# Altium PCB PCB NRES Front Plane board.PcbDoc
Units mm, origin at the board's own origin, x right, y up, seen from the top; angles counter-clockwise.
Board outline 213.05 x 128.4 mm, 2 copper layers (Top Layer (GTL), Bottom Layer (GBL)); 3 components, 0 nets, 65 pads, 0 vias.
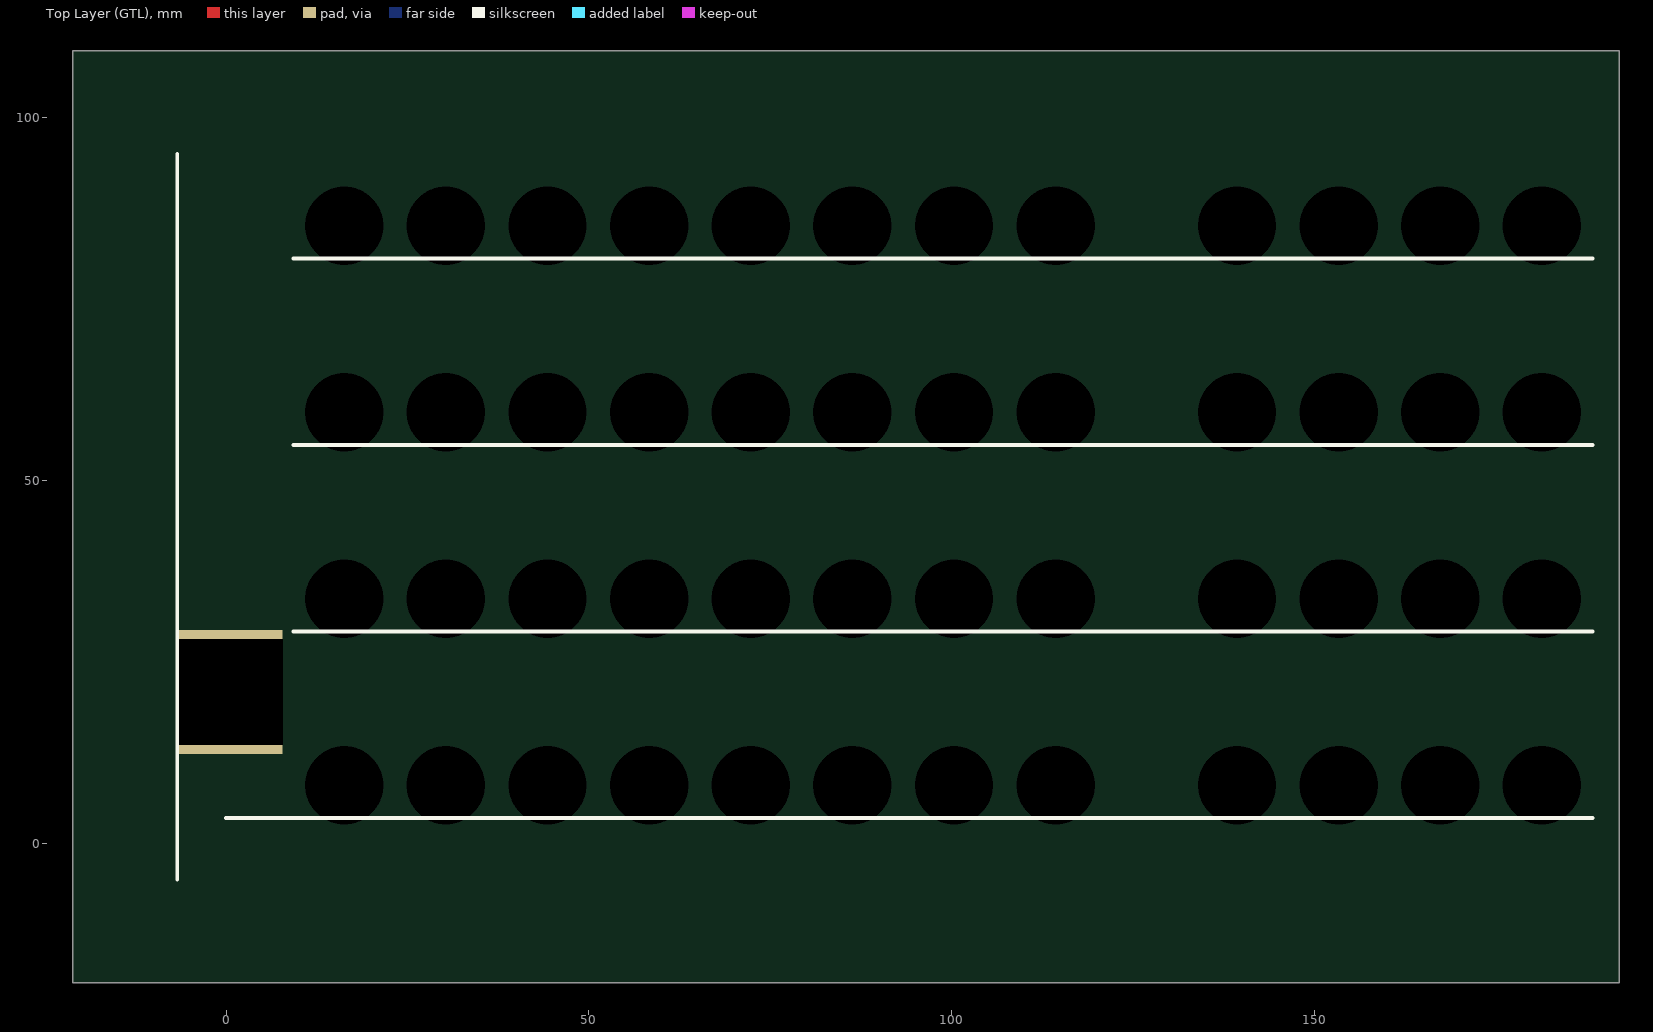
[diagram p0: Top Layer (GTL) view]
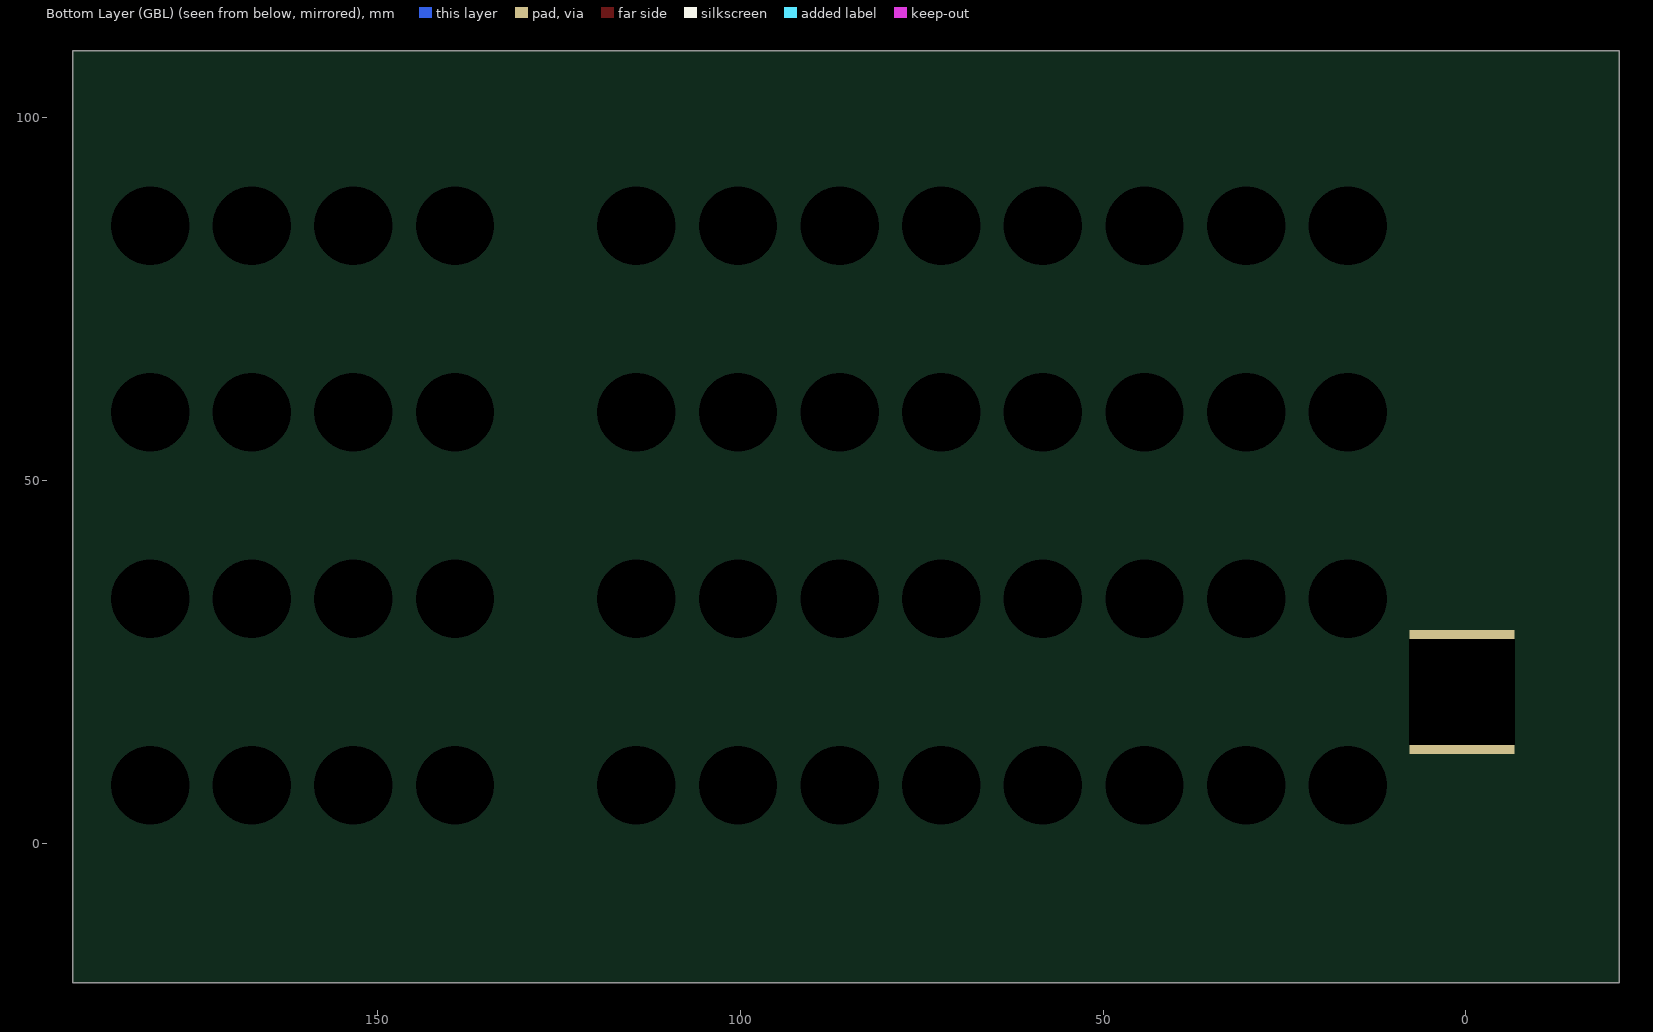
[diagram p1: Bottom Layer (GBL) view, seen from below]

## Layer stack, top to bottom
Top Layer (GTL): signal copper 0.0356
Dielectric: core 0.32, FR-4, Dk 4.8
Bottom Layer (GBL): signal copper 0.0356

## Board outline
-21.1,-19.2 191.95,-19.2 191.95,109.2 -21.1,109.2

## Design rules (kind name [scope] priority, off if disabled: settings)
Clearance [All] p1: gap=0.254
PolygonConnect [All] p1: connectstyle=Relief reliefconductorwidth=0.254 reliefentries=4 polygonreliefangle="90 Angle"
RoutingVias [All] p1: holewidth=0.711 width=1.27 viastyle="Through Hole" minholewidth=0.711 minwidth=1.27 maxholewidth=0.711 maxwidth=1.27
SilkscreenOverComponentPads [All] p1: minsilkscreentomaskgap=0.254
SolderMaskExpansion [All] p1: expansion=0.102
Width [All] p1: maxlimit=0.254 minlimit=0.254 preferedwidth=0.254
27 further rules are at their usual default settings.

## Components (designator, comment, footprint, x,y, rotation, side; value= is the part's Value field where it differs from the comment)
? "Comment" "TARGET MECHANICAL 5" 213.85,-116.482 r0 top
? "Comment" "TARGET MECHANICAL 5" 212.834,-96.67 r0 top
? "Comment" "TARGET MECHANICAL 5" 211.818,-79.906 r0 top

## Footprints (in the part's own frame and the unit in brackets; to place one, negate y for a bottom-side part, rotate by r counter-clockwise, add the part's x,y. Pads: shape width x height; smd on the part's side, far side on the other; paste and mask are expansions set on the pad)
"TARGET MECHANICAL 5" [mm]

## Free pads (board coordinates)
  round 9.1 hole 10.8 unplated paste-0.152 mask-0.089: 9(16.3,8) 9(16.3,8) 9(16.3,8) 9(16.3,8) 9(16.3,33.7) 9(16.3,33.7) 9(16.3,59.4) 9(16.3,59.4) 9(16.3,85.1) 9(16.3,85.1) 10(30.3,8) 10(30.3,8) 10(30.3,33.7) 10(30.3,59.4) 10(30.3,85.1) 11(44.3,8) 11(44.3,8) 11(44.3,33.7) 11(44.3,59.4) 11(44.3,85.1) 12(58.3,8) 12(58.3,8) 12(58.3,33.7) 12(58.3,59.4) 12(58.3,85.1) 13(72.3,8) 13(72.3,8) 13(72.3,33.7) 13(72.3,59.4) 13(72.3,85.1) 14(86.3,8) 14(86.3,8) 14(86.3,33.7) 14(86.3,59.4) 14(86.3,85.1) 15(100.3,8) 15(100.3,8) 15(100.3,33.7) 15(100.3,59.4) 15(100.3,85.1) 16(114.3,8) 16(114.3,8) 16(114.3,33.7) 16(114.3,59.4) 16(114.3,85.1) 17(139.3,8) 17(139.3,8) 17(139.3,33.7) 17(139.3,59.4) 17(139.3,85.1) 18(153.3,8) 18(153.3,8) 18(153.3,33.7) 18(153.3,59.4) 18(153.3,85.1) 19(167.3,8) 19(167.3,8) 19(167.3,33.7) 19(167.3,59.4) 19(167.3,85.1) 20(181.3,8) 20(181.3,33.7) 20(181.3,59.4) 20(181.3,85.1)
  rect 14.5x17.11 hole 14.5 square unplated paste-0.152 mask-0.089: 10(0.55,20.85)

## Nets (pads, with @x,y where several pads share a name; then routed paths per layer and width w, separated by ;. In a path a pad name is that pad's centre, name@x,y a point inside that pad or via, vN(x,y) a via of type N, cw(c..) or ccw(c..) an arc to the next point about the centre after c; other vN are vias at no path point)

## Other copper
Top Layer (GTL):
  text "*.GTL - TOP LAYER GERBER DATA" at 115.933,-83.081 h2.03
Bottom Layer (GBL):
  text "*.GBL - BOTTOM LAYER GERBER DATA" at 115.933,-118.209 h2.03

## Silkscreen, mask and mechanical layers (free items; w line width, h text height)
Top Overlay:
  lines w0.5: -6.7,-5 -6.7,95 ; 0,3.5 188.3,3.5 ; 9.3,29.2 188.3,29.2 ; 9.3,54.9 188.3,54.9 ; 9.3,80.6 188.3,80.6
  text "Threads on LEMO sitting on PCB top surface" at 224.053,5.105 h1.52
  text "PCB is 3mm back from backside of front panel" at 225.018,-9.313 h1.02
  text "the 3mm leaves room for back nut and washer" at 225.018,-12.713 h1.02
  text "LEMOs are installed flush to PCB then back nut is screwed on" at 224.018,-16.213 h1.02
  text "LEMO sticks out of front panel 4mm to fit nut + colored washer" at 223.018,-19.213 h1.02
  text "*.GTO - TOP OVERLAY GERBER DATA" at 115.933,-122.112 h2.03
Bottom Overlay:
  text "*GBO - BOTTOM OVERLAY GERBER DATA" at 115.933,-133.822 h2.03
Top Paste:
  text "*.GTP - TOP-SIDE SOLDER PASTE MASK" at 115.933,-129.919 h2.03
Bottom Paste:
  text "*.GBP - BOTTOM-SIDE SOLDER PASTE MASK" at 115.933,-141.628 h2.03
Top Solder:
  text "*.GTS - TOP SOLDER MASK GERBER DATA" at 115.933,-126.015 h2.03
Bottom Solder:
  text "*.GBS - BOTTOM SOLDER MASK GERBER DATA" at 115.933,-137.725 h2.03
Mechanical 2:
  lines w0.254: -233.292,-237.513 -233.292,168.887 300.108,168.887 300.108,-237.513 -233.292,-237.513 ; 197.111,-234.821 ccw(c198.381,-234.821) 198.381,-236.091 206.763,-236.091 ccw(c206.763,-235.075) 207.779,-235.075 207.779,-230.757 ccw(c206.763,-230.757) 206.763,-229.741 197.111,-229.741 197.111,-234.821 ; 197.111,-227.455 ccw(c198.381,-227.455) 198.381,-228.725 297.441,-228.725 ccw(c297.441,-227.455) 298.711,-227.455 298.711,-222.629 ccw(c297.441,-222.629) 297.441,-221.359 197.111,-221.359 197.111,-227.455 ; 197.111,-219.073 ccw(c198.381,-219.073) 198.381,-220.343 246.133,-220.343 ccw(c246.133,-219.073) 247.403,-219.073 247.403,-215.263 ccw(c246.133,-215.263) 246.133,-213.993 197.111,-213.993 197.111,-219.073 ; 197.111,-211.961 ccw(c198.127,-211.961) 198.127,-212.977 218.701,-212.977 ccw(c218.701,-211.707) 219.971,-211.707 219.971,-207.897 ccw(c218.701,-207.897) 218.701,-206.627 197.111,-206.627 197.111,-211.961 ; 208.795,-235.075 ccw(c209.811,-235.075) 209.811,-236.091 259.595,-236.091 ccw(c259.595,-235.075) 260.611,-235.075 260.611,-230.757 ccw(c259.595,-230.757) 259.595,-229.741 208.795,-229.741 208.795,-235.075 ; 220.987,-211.707 ccw(c222.257,-211.707) 222.257,-212.977 246.133,-212.977 ccw(c246.133,-211.707) 247.403,-211.707 247.403,-207.897 ccw(c246.133,-207.897) 246.133,-206.627 220.987,-206.627 220.987,-211.707 ; 248.419,-219.073 ccw(c249.689,-219.073) 249.689,-220.343 297.441,-220.343 ccw(c297.441,-219.073) 298.711,-219.073 298.711,-215.263 ccw(c297.441,-215.263) 297.441,-213.993 248.419,-213.993 248.419,-219.073 ; 248.419,-211.707 ccw(c249.689,-211.707) 249.689,-212.977 273.565,-212.977 ccw(c273.565,-211.707) 274.835,-211.707 274.835,-207.897 ccw(c273.565,-207.897) 273.565,-206.627 248.419,-206.627 248.419,-211.707 ; 261.627,-234.821 ccw(c262.897,-234.821) 262.897,-236.091 271.279,-236.091 ccw(c271.279,-235.075) 272.295,-235.075 272.295,-230.757 ccw(c271.279,-230.757) 271.279,-229.741 261.627,-229.741 261.627,-234.821 ; 273.311,-235.075 ccw(c274.327,-235.075) 274.327,-236.091 297.441,-236.091 ccw(c297.441,-234.821) 298.711,-234.821 298.711,-231.011 ccw(c297.441,-231.011) 297.441,-229.741 273.311,-229.741 273.311,-235.075 ; 275.851,-211.707 ccw(c277.121,-211.707) 277.121,-212.977 297.441,-212.977 ccw(c297.441,-211.707) 298.711,-211.707 298.711,-207.897 ccw(c297.441,-207.897) 297.441,-206.627 275.851,-206.627 275.851,-211.707
  lines w0.508: -232.782,-221.108 cw(c-231.514,-223.01) -231.514,-220.724 ; -231.514,-221.74 ccw(c-231.514,-223.01) -232.784,-223.01 -232.784,-235.456 ccw(c-231.514,-235.456) -231.514,-236.726 -150.234,-236.726 ccw(c-150.234,-235.456) -148.964,-235.456 -148.964,-226.82 ccw(c-150.234,-226.82) -150.234,-225.55 -217.29,-225.55 ; -148.332,-236.724 ccw(c-150.234,-235.456) -147.948,-235.456 -147.948,-226.82 ; 195.998,-237.106 cw(c198.381,-234.821) 195.079,-234.821 195.079,-192.403 cw(c198.381,-192.403) 198.381,-189.101 297.441,-189.101 cw(c297.441,-192.403) 299.693,-189.988 ; -42.03,-232.941 ccw(c-38.728,-232.941) -38.728,-236.243 81.668,-236.243 ccw(c81.668,-232.941) 84.97,-232.941 84.97,-192.555 ccw(c81.668,-192.555) 81.668,-189.253 -38.728,-189.253 ccw(c-38.728,-192.555) -42.03,-192.555 -42.03,-232.941 ; 196.095,-234.821 ccw(c198.381,-234.821) 198.381,-237.107 297.441,-237.107 ccw(c297.441,-234.821) 299.727,-234.821 299.727,-192.403 ccw(c297.441,-192.403) 297.441,-190.117 198.381,-190.117 ccw(c198.381,-192.403) 196.095,-192.403 196.095,-234.821
  lines w0.61: 22.74,-232.179 26.55,-232.179 ; 22.74,-225.829 26.55,-225.829 ; 22.74,-219.479 26.55,-219.479 ; 22.74,-213.129 26.55,-213.129 ; 22.74,-206.779 26.55,-206.779
  lines w0.762: -245.992,-250.213 -245.992,181.587 312.808,181.587 312.808,-250.213 -245.992,-250.213
  lines w1.27: 200.794,-202.842 242.704,-202.842 ; 200.794,-193.19 242.704,-193.19 ; 242.704,-202.842 242.704,-193.19 ; 242.704,-202.842 200.54,-202.842 200.54,-193.19 242.704,-193.19
  text "NOTES (UNLESS OTHERWISE SPECIFIED):" at -225.164,155.577 h2.29
  text "GENERAL" at -222.624,150.497 h2.29
  text "1)" at -220.084,145.416 h1.91
  text "PCB IS x-LAYER, .062\" THICK." at -215.004,145.417 h1.91
  text "2)" at -220.084,141.606 h1.91
  text "CONSTRUCTION IS SOLDER-MASK-OVER-BARE-COPPER (SMOBC)." at -215.004,141.606 h1.91
  text "3)" at -220.084,137.796 h1.91
  text "ACCEPTABILITY SHALL BE BASED ON IPC-A-600, CLASS 2." at -215.004,137.796 h1.91
  text "4)" at -220.084,133.986 h1.91
  text "THE FOLLOWING GERBER RS274X PHOTO TOOL FILES SHALL BE USED TO DEFINE ALL CIRCUIT FEATURES:" at -215.004,133.986 h1.91
  text "*.GTL - TOP LAYER GERBER DATA" at -208.044,128.628 h2.03
  text "*.G1 - MID LAYER 1 GERBER DATA" at -208.044,124.725 h2.03
  text "*.G2 - MID LAYER 2 GERBER DATA" at -208.044,120.822 h2.03
  text "*.G3 - MID LAYER 3 GERBER DATA" at -208.044,116.919 h2.03
  text "*.GP1 - INTERNAL PLANE LAYER 1 GERBER DATA" at -208.044,113.016 h2.03
  text "*.GP2 - INTERNAL PLANE LAYER 2 GERBER DATA" at -208.044,109.112 h2.03
  text "*.GP3- INTERNAL PLANE LAYER 3 GERBER DATA" at -208.044,105.209 h2.03
  text "*.GP4 - INTERNAL PLANE LAYER 4 GERBER DATA" at -208.044,101.306 h2.03
  text "*.GP5- INTERNAL PLANE LAYER 5 GERBER DATA" at -208.044,97.403 h2.03
  text "*.GBL - BOTTOM LAYER GERBER DATA" at -208.044,93.5 h2.03
  text "*.GTO - TOP OVERLAY GERBER DATA" at -208.044,89.597 h2.03
  text "*.GTS - TOP SOLDER MASK GERBER DATA" at -208.044,85.694 h2.03
  text "*.GTP - TOP-SIDE SOLDER PASTE MASK" at -208.044,81.79 h2.03
  text "*GBO - BOTTOM OVERLAY GERBER DATA" at -208.044,77.887 h2.03
  text "*.GBS - BOTTOM SOLDER MASK GERBER DATA" at -208.044,73.984 h2.03
  text "*.GBP - BOTTOM-SIDE SOLDER PASTE MASK" at -208.044,70.081 h2.03
  text "5)" at -222.547,51.901 h1.91
  text "THE PHOTO TOOL SHALL NOT BE COMPENSATED WITHOUT PRIOR ENGINEERING APPROVAL." at -217.467,51.901 h1.91
  text "PCB DESIGNER: RICH LOBDILL   PH (805) 880-1621  FAX (805) 961-1792." at -217.467,48.092 h1.91
  text "FABRICATION TOLERANCES" at -221.15,39.804 h2.29
  text "6)" at -218.61,34.723 h1.91
  text "END PRODUCT CONDUCTOR WIDTHS AND PAD DIAMETERS SHALL NOT VARY MORE THAN" at -213.53,34.723 h1.91
  text "0.002\" FROM THE 1:1 DIMENSIONS OF THE MASTER ARTWORK." at -213.53,30.914 h1.91
  text "7)" at -218.61,27.103 h1.91
  text "THE CONDUCTIVE PATTERN SHALL BE POSITIONED SO THAT THE LOCATION OF ANY PAD OR" at -213.53,27.103 h1.91
  text "LAND SHALL BE WITHIN 0.005\" DIAMETER TO THE TRUE POSITION OF THE HOLE IT CIRCUMSCRIBES." at -213.53,23.294 h1.91
  text "8)" at -218.61,19.483 h1.91
  text "ALL DRILL HOLE SIZES AND TOLERANCES APPLY AFTER PLATING." at -213.53,19.483 h1.91
  text "9)" at -218.61,15.673 h1.91
  text "THE MINIMUM ANNULAR RING SHALL BE 0.005\"." at -213.53,15.673 h1.91
  text "10)" at -220.007,11.863 h1.91
  text "BOW AND TWIST SHALL NOT EXCEED 0.010\" PER INCH." at -213.53,11.863 h1.91
  text "11)" at -219.753,8.053 h1.91
  text "FOR PCB ROUTING DIMENSIONS: .XXX = +/-.005\"  .XX = +/-.020\"" at -213.53,8.053 h1.91
  text "MATERIAL" at -221.15,2.974 h2.29
  text "12)" at -220.007,-2.107 h1.91
  text "BASE MATERIAL IS FR4 EPOXY FIBERGLASS" at -213.353,-2.258 h1.91
  text "SEE STACK-UP LEGEND FOR COPPER CLADDING CALL OUTS" at -213.353,-5.814 h1.91
  text "13)" at -220.007,-5.917 h1.91
  text "PLATING" at -221.15,-10.996 h2.29
  text "14)" at -220.007,-15.95 h1.91
  text "ALL HOLES AND CONDUCTIVE SURFACES SHALL BE PLATED WITH A MINIMUM OF 0.001\" COPPER." at -213.53,-15.95 h1.91
  text "15)" at -220.007,-19.76 h1.91
  text "AFTER SOLDERMASK, ALL EXPOSED HOLES AND CONDUCTIVE SURFACES SHALL BE COATED" at -213.53,-19.76 h1.91
  text "WITH A GOLD IMMERSION PLATING TO PRESERVE SOLDERABILITY." at -213.353,-23.594 h1.91
  text "16)" at -219.347,-28.217 h1.91
  text "COPPER THEVING ON LAYERS AS NEEDED" at -213.276,-28.269 h1.91
  text "COATINGS" at -221.15,-36.142 h2.29
  text "THE SOLDERMASK SHALL BE BLACK LIQUID PHOTO-IMAGEABLE PER IPC-SM-840, TYPE-B, CLASS 2." at -213.53,-41.096 h1.91
  text "17)" at -219.728,-41.171 h1.91
  text "THE SOLDERMASK REGISTRATION ALLOWANCE IS 0.003\".  THERE SHALL BE NO SOLDERMASK ON" at -213.53,-44.906 h1.91
  text "18)" at -219.982,-45.616 h1.91
  text "ANY SOLDER PAD OR LAND." at -213.53,-48.716 h1.91
  text "MARKING" at -221.15,-53.795 h2.29
  text "THE LEGEND SHALL BE SCREEN-PRINTED USING PERMANENT YELLOW EPOXY INK." at -213.53,-58.749 h1.91
  text "19)" at -220.109,-58.824 h1.91
  text "THE SCREEN PRINTING REGISTRATION ALLOWANCE IS 0.007\".  THERE SHALL BE NO INK ON ANY" at -213.53,-62.559 h1.91
  text "20)" at -220.109,-63.015 h1.91
  text "SOLDER PAD OR LAND." at -213.53,-66.368 h1.91
  text "21)" at -220.007,-69.798 h1.91
  text "THE VENDOR CODE AND UL FLAMMABILITY RATING MAY BE ETCHED IN THE FOIL OR MARKED IN" at -213.53,-70.179 h1.91
  text "PERMANENT EPOXY INK (VENDOR'S OPTION)." at -213.53,-73.988 h1.91
  text "ELECTRICAL TESTING" at -221.15,-79.068 h2.29
  text "22)" at -220.007,-84.022 h1.91
  text "ALL BOARDS SHALL BE ELECTRICALLY TESTED TO THE SUPPLIED IPC-D-356A NET LIST" at -213.53,-84.022 h1.91
  text "*.G1 - MID LAYER 1 GERBER DATA" at 115.933,-86.984 h2.03
  text "FOR CONTINUITY, OPENS AND SHORTS." at -213.53,-87.831 h1.91
  text "*.G2 - MID LAYER 2 GERBER DATA" at 115.933,-90.887 h2.03
  text "*.G3 - MID LAYER 3 GERBER DATA" at 115.933,-94.79 h2.03
  text "*.GP1 - INTERNAL PLANE LAYER 1 GERBER DATA" at 115.933,-98.693 h2.03
  text "*.GP2 - INTERNAL PLANE LAYER 2 GERBER DATA" at 115.933,-102.597 h2.03
  text "*.GP3- INTERNAL PLANE LAYER 3 GERBER DATA" at 115.933,-106.5 h2.03
  text "COPPER THICKNESS" at 7.459,-110.22 h2.54
  text "*.GP4 - INTERNAL PLANE LAYER 4 GERBER DATA" at 115.933,-110.403 h2.03
  text "*.GP5- INTERNAL PLANE LAYER 5 GERBER DATA" at 115.933,-114.306 h2.03
  text "1/2 oz,  1 oz Finished" at -14.841,-117.72 h2.54
  text "1 oz" at -14.241,-127.02 h2.54
  text "1 oz" at -14.241,-134.72 h2.54
  text "2 oz" at -13.141,-144.62 h2.54
  text "2 oz" at -12.941,-153.12 h2.54
  text "1 oz" at -13.941,-161.82 h2.54
  text "1 oz" at -13.941,-171.42 h2.54
  text "1/2 oz,  1 oz Finished" at -17.841,-180.62 h2.54
  text "Las Cumbres Observatory, Inc." at 247.022,-193.698 h2.29
  text "Las Cumbres Observatory" at 202.064,-196.746 h3.81
  text "PRIMARY PCB SPECIFICATIONS" at -30.676,-197.127 h5.08
  text "6740 Cortona Dr." at 258.198,-197.61 h2.29
  text "Global Telescope Network" at 206.128,-200.81 h3.17
  text "Goleta, CA 93117" at 256.928,-201.42 h2.29
  text "(REFER TO COMPLETE SPEC LISTING AT LEFT FOR FURTHER DETAILS)" at -39.49,-202.334 h2.54
  text "www.lcogt.net" at 260.484,-205.128 h2.29
  text "DATE" at 197.619,-207.942 h0.81
  text "DESIGNED" at 221.495,-207.942 h0.81
  text "DRAWN" at 248.927,-207.942 h0.81
  text "SCALE" at 276.359,-207.942 h0.81
  text "NUMBER OF LAYERS" at -36.95,-208.684 h3.81
  text "XX" at 53.22,-208.684 h3.81
  text "Rich Lobdill" at 256.674,-210.462 h1.4
  text "Rich Lobdill" at 228.099,-210.589 h1.4
  text "1 : 1" at 283.598,-210.945 h2.29
  text "XX/XX/XXXX" at 198.381,-211.122 h2.29
  text "FINISHED THICKNESS" at -36.95,-215.034 h3.81
  text ".062\"" at 48.775,-215.034 h3.81
  text "CHECKED/DATE" at 197.619,-215.308 h0.81
  text "APPROVED/DATE" at 248.927,-215.308 h0.81
  text "BASE MATERIAL" at -36.95,-221.384 h3.81
  text "FR4" at 46.87,-221.384 h3.81
  text "TITLE" at 197.619,-222.674 h0.81
  text "175-XXXXX, NAME" at 203.207,-226.337 h2.54
  text "GOLD IMMERSION" at 34.323,-226.896 h3.81
  text "PLATING TYPE" at -36.95,-227.734 h3.81
  text "THIS DRAWING EMBODIES A PROPRIETARY DESIGN OWNED BY LAS CUMBRES" at -230.498,-228.344 h1.52
  text "OBSERVATORY.  IT IS SUBMITTED FOR A SPECIFIC PURPOSE UNDER A CON-" at -230.498,-230.884 h1.52
  text "SIZE" at 197.619,-231.056 h0.81
  text "DOC NO." at 209.303,-231.056 h0.81
  text "REV" at 262.135,-231.056 h0.81
  text "SHEET" at 273.819,-231.056 h0.81
  text "FIDENTIAL RELATIONSHIP, AND EXCEPT FOR PURPOSES EXPRESSLY GRANTED" at -230.498,-233.297 h1.52
  text "OF" at 284.741,-233.678 h1.52
  text "SOLDER MASK COLOR" at -36.95,-234.084 h3.81
  text "BLACK" at 50.045,-234.084 h3.81
  text "1" at 280.423,-234.186 h2.54
  text "X" at 290.583,-234.186 h2.54
  text "1" at 265.818,-234.516 h3.3
  text "-" at 223.4,-234.567 h3.3
  text "GPT" at 241.681,-234.942 h3.3
  text "C" at 201.048,-234.973 h2.54
  text "IN WRITING, ALL RIGHTS ARE RESERVED BY LAS CUMBRES OBSERVATORY." at -230.498,-235.583 h1.52
Mechanical 5:
  the board outline again, w0.5
  text "175-xxxxx" at 116.467,-72.144 h2.03
  text "LAS CUMBRES OBSERVATORY     xx/xx/xxxx" at 116.467,-75.955 h2.03
Drill Drawing:
  lines w0.254: -233.292,-237.513 -233.292,168.887 300.108,168.887 300.108,-237.513 -233.292,-237.513 ; 197.111,-234.821 ccw(c198.381,-234.821) 198.381,-236.091 206.763,-236.091 ccw(c206.763,-235.075) 207.779,-235.075 207.779,-230.757 ccw(c206.763,-230.757) 206.763,-229.741 197.111,-229.741 197.111,-234.821 ; 197.111,-227.455 ccw(c198.381,-227.455) 198.381,-228.725 297.441,-228.725 ccw(c297.441,-227.455) 298.711,-227.455 298.711,-222.629 ccw(c297.441,-222.629) 297.441,-221.359 197.111,-221.359 197.111,-227.455 ; 197.111,-219.327 ccw(c198.127,-219.327) 198.127,-220.343 234.195,-220.343 ccw(c234.195,-219.073) 235.465,-219.073 235.465,-215.263 ccw(c234.195,-215.263) 234.195,-213.993 197.111,-213.993 197.111,-219.327 ; 208.795,-235.075 ccw(c209.811,-235.075) 209.811,-236.091 259.595,-236.091 ccw(c259.595,-235.075) 260.611,-235.075 260.611,-230.757 ccw(c259.595,-230.757) 259.595,-229.741 208.795,-229.741 208.795,-235.075 ; 236.481,-219.073 ccw(c237.751,-219.073) 237.751,-220.343 273.565,-220.343 ccw(c273.565,-219.073) 274.835,-219.073 274.835,-215.263 ccw(c273.565,-215.263) 273.565,-213.993 236.481,-213.993 236.481,-219.073 ; 261.627,-234.821 ccw(c262.897,-234.821) 262.897,-236.091 271.279,-236.091 ccw(c271.279,-235.075) 272.295,-235.075 272.295,-230.757 ccw(c271.279,-230.757) 271.279,-229.741 261.627,-229.741 261.627,-234.821 ; 273.311,-235.075 ccw(c274.327,-235.075) 274.327,-236.091 297.441,-236.091 ccw(c297.441,-234.821) 298.711,-234.821 298.711,-231.011 ccw(c297.441,-231.011) 297.441,-229.741 273.311,-229.741 273.311,-235.075 ; 275.851,-219.073 ccw(c277.121,-219.073) 277.121,-220.343 297.441,-220.343 ccw(c297.441,-219.073) 298.711,-219.073 298.711,-215.263 ccw(c297.441,-215.263) 297.441,-213.993 275.851,-213.993 275.851,-219.073
  lines w0.5: -6.7,90 191.95,90 191.95,0
  lines w0.508: -232.655,-221.489 cw(c-231.387,-223.391) -231.387,-221.105 ; -231.387,-222.121 ccw(c-231.387,-223.391) -232.657,-223.391 -232.657,-235.837 ccw(c-231.387,-235.837) -231.387,-237.107 -150.107,-237.107 ccw(c-150.107,-235.837) -148.837,-235.837 -148.837,-227.201 ccw(c-150.107,-227.201) -150.107,-225.931 -217.163,-225.931 ; -148.205,-237.105 ccw(c-150.107,-235.837) -147.821,-235.837 -147.821,-227.201 ; 195.966,-237.073 cw(c198.381,-234.821) 195.079,-234.821 195.079,-213.993 cw(c197.111,-213.993) 197.111,-211.961 297.441,-211.961 cw(c297.441,-215.263) 299.693,-212.848 ; 196.095,-234.821 ccw(c198.381,-234.821) 198.381,-237.107 297.441,-237.107 ccw(c297.441,-234.821) 299.727,-234.821 299.727,-215.263 ccw(c297.441,-215.263) 297.441,-212.977 197.111,-212.977 ccw(c197.111,-213.993) 196.095,-213.993 196.095,-234.821
  lines w0.762: -245.992,-250.213 -245.992,181.587 312.808,181.587 312.808,-250.213 -245.992,-250.213
  text ".Legend" at 32.748,-132.941 h2.54
  text "DESIGNED" at 197.619,-215.308 h0.81
  text "DRAWN" at 236.989,-215.308 h0.81
  text "SCALE" at 276.359,-215.308 h0.81
  text "Rich Lobdill" at 209.964,-217.752 h1.4
  text "Rich Lobdill" at 249.613,-217.803 h1.4
  text "1 : 1" at 283.598,-218.311 h2.29
  text "TITLE" at 197.619,-222.674 h0.81
  text "175-XXXXX, NAME" at 203.131,-226.337 h2.54
  text "THIS DRAWING EMBODIES A PROPRIETARY DESIGN OWNED BY LAS CUMBRES" at -230.371,-228.725 h1.52
  text "SIZE" at 197.619,-231.056 h0.81
  text "DOC NO." at 209.303,-231.056 h0.81
  text "REV" at 262.135,-231.056 h0.81
  text "SHEET" at 273.819,-231.056 h0.81
  text "OBSERVATORY.  IT IS SUBMITTED FOR A SPECIFIC PURPOSE UNDER A CON-" at -230.371,-231.265 h1.52
  text "FIDENTIAL RELATIONSHIP, AND EXCEPT FOR PURPOSES EXPRESSLY GRANTED" at -230.371,-233.678 h1.52
  text "OF" at 284.741,-233.678 h1.52
  text "2" at 280.042,-234.186 h2.54
  text "X" at 290.583,-234.186 h2.54
  text "-" at 223.4,-234.567 h3.3
  text "1" at 265.691,-234.567 h3.3
  text "C" at 201.048,-234.973 h3.05
  text "GD1" at 244.228,-234.973 h3.05
  text "IN WRITING, ALL RIGHTS ARE RESERVED BY LAS CUMBRES OBSERVATORY." at -230.371,-235.964 h1.52

## Dimensions
-6.7,-5 to 0,3.5 on Mechanical 2
181.3,59.4 to 181.3,85.1 on Mechanical 2
-21.1,-19.2 to -6.7,-5 on Mechanical 2
-21.1,-19.2 to -21.1,109.2 on Mechanical 2
-21.1,-19.2 to 191.95,-19.2 on Mechanical 2
-21.1,109.2 to 16.3,85.1 on Mechanical 2
16.3,85.1 to 30.3,85.1 on Mechanical 2
114.3,85.1 to 139.3,85.1 on Mechanical 2
-21.1,-19.2 to 16.3,8 on Mechanical 2
-21.1,-19.2 to 0.55,20.85 on Mechanical 2
16.3,8 to 16.3,33.7 on Mechanical 2
-21.1,-19.2 to 0.55,20.85 on Mechanical 2
181.3,8 to 188.3,3.5 on Mechanical 2
188.3,3.5 to 0,3.5 on Mechanical 2
191.95,-19.2 to 188.3,3.5 on Mechanical 2
188.3,3.5 to 188.3,29.2 on Mechanical 2
188.3,54.9 to 188.3,29.2 on Mechanical 2
-21.1,-19.2 to 9.3,-0.504 on Mechanical 2
-21.1,-19.2 to 16.3,8 on Mechanical 2
186.334,11.176 to 202.59,23.47 on Top Overlay